# Altium PCB RKSTM32_PCB.PcbDoc
Units mm, origin at the board's own origin, x right, y up, seen from the top; angles counter-clockwise.
Board outline 36.72 x 26.1 mm, 2 copper layers (Top Layer, Bottom Layer), stack 1.671 mm thick; 31 components, 26 nets, 137 pads, 0 vias.
Unrouted connection lines stored in the file: 87.
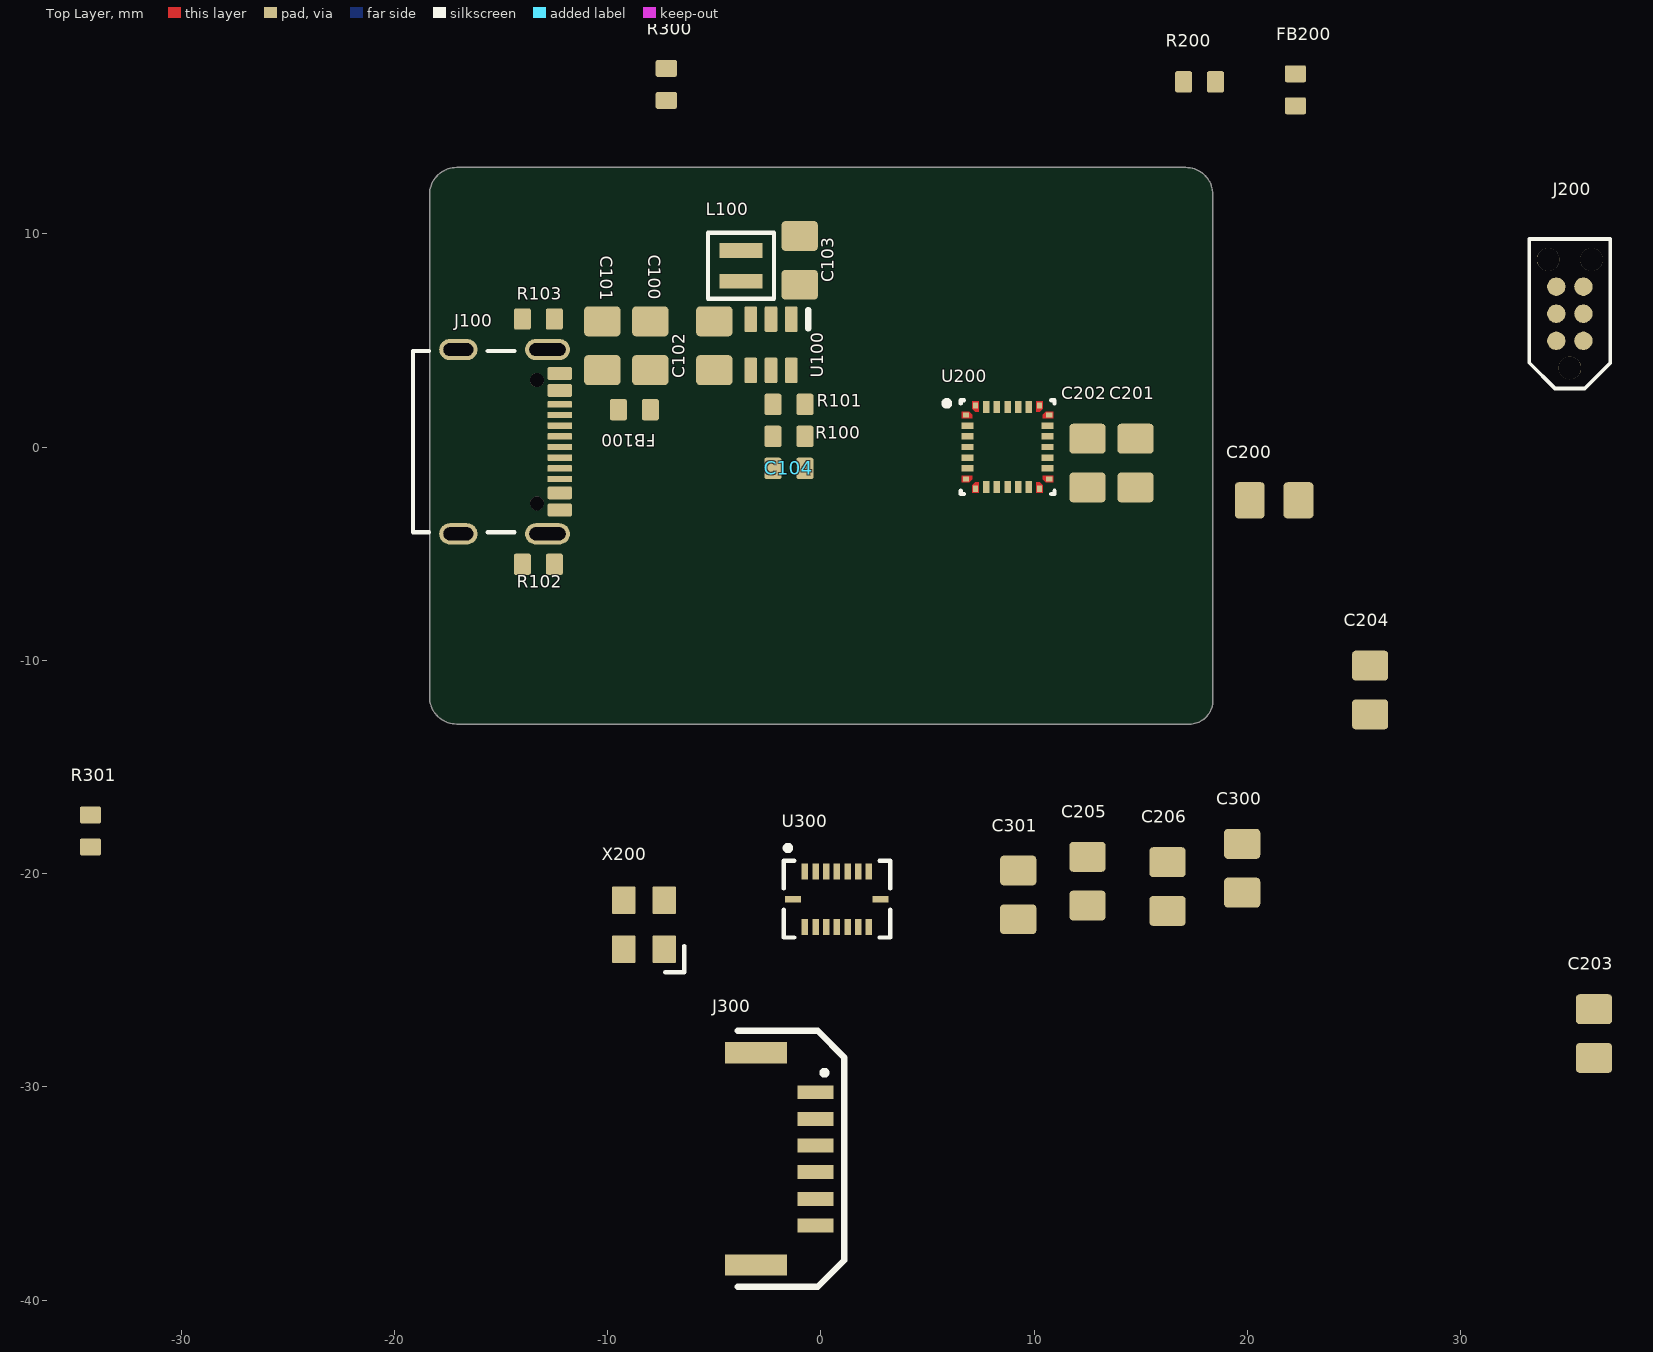
[diagram p0: Top Layer view]
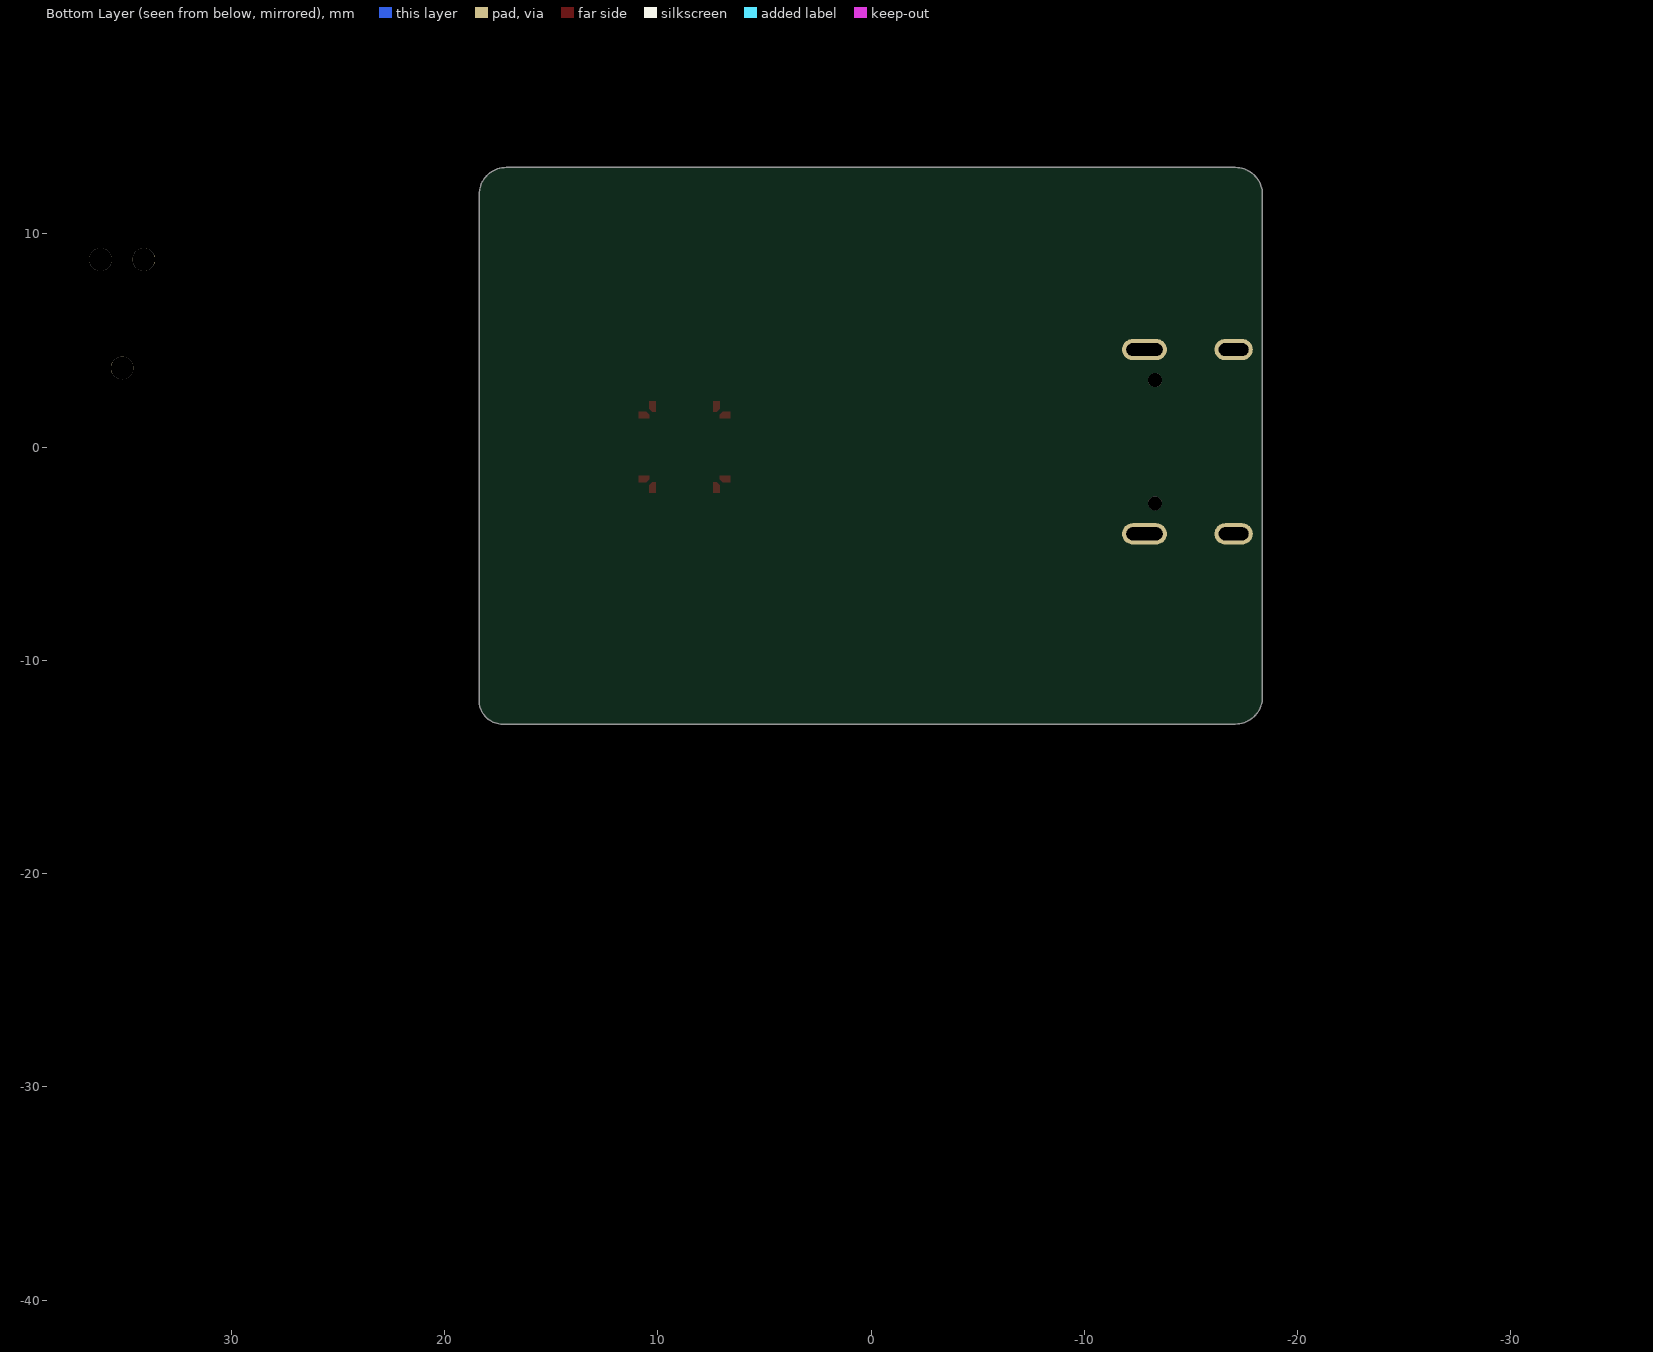
[diagram p1: Bottom Layer view, seen from below]

## Layer stack, top to bottom
Top Solder: solder mask 0.0102, Solder Resist, Dk 3.5
Top Layer: signal copper 0.0356
Dielectric 1: dielectric 1.6, FR-4, Dk 4.6
Bottom Layer: signal copper 0.0356
Bottom Solder: solder mask 0.0102, Solder Resist, Dk 3.5

## Board outline
-18.35,-11.72 ccw(c-17.08,-11.72) -17.08,-12.99 17.275,-12.99 ccw(c17.275,-11.89) 18.375,-11.89 18.375,11.84 ccw(c17.105,11.84) 17.105,13.11 -17.08,13.11 ccw(c-17.08,11.84) -18.35,11.84

## Design rules (kind name [scope] priority, off if disabled: settings)
Clearance [All] p1: gap=0.254 ignorepadtopadclearanceinfootprint=FALSE except(0.2: Arc-Arc Arc-Track Track-Track)
DiffPairsRouting [All] p1: maxlimit=0.254 minlimit=0.254 mostfreqgap=0.254 toplayer_minwidth=0.381 toplayer_maxwidth=0.381 toplayer_prefwidth=0.381 bottomlayer_minwidth=0.381 bottomlayer_maxwidth=0.381 bottomlayer_prefwidth=0.381 maxuncoupledlength=12.7
PolygonConnect [All] p1: thpad.connectstyle=Relief thpad.reliefconductorwidth=0.254 thpad.reliefentries=4 thpad.polygonreliefangle="90 Angle" thpad.airgapwidth=0.254 smdpad.connectstyle=Relief smdpad.reliefconductorwidth=0.254 smdpad.reliefentries=4 smdpad.polygonreliefangle="90 Angle" smdpad.airgapwidth=0.254 via.connectstyle=Direct via.reliefconductorwidth=0.254 via.reliefentries=4 via.polygonreliefangle="90 Angle" via.airgapwidth=0.254
RoutingVias [All] p1: holewidth=0.3 width=0.7 viastyle="Through Hole" minholewidth=0.25 minwidth=0.6 maxholewidth=0.3 maxwidth=0.7
SolderMaskExpansion [All] p1: expansion=0 istentingtop=FALSE
SupplyNets "Schematic Supply Nets_4" [InNet('+3V3')] p1: voltage=0.000
SupplyNets "Schematic Supply Nets_3" [InNet('GND')] p2: voltage=0.000
SupplyNets "Schematic Supply Nets_2" [InNet('+VBUS')] p3: voltage=0.000
SupplyNets "Schematic Supply Nets_1" [InNet('+3V3A')] p4: voltage=0.000
SupplyNets "Schematic Supply Nets" [InNet('+5V')] p5: voltage=0.000
UnRoutedNet [All] p1: checkbadconnections=TRUE
Width [All] p1: maxlimit=1 minlimit=0.15 preferedwidth=0.3
28 further rules are at their usual default settings.

## Classes and differential pairs
differential pair USB_D: +USB_D_P -USB_D_N

## Components (designator, comment, footprint, x,y, rotation, side; value= is the part's Value field where it differs from the comment)
C100 "100n" CAP_0805 -8,4.75 r270 top
C101 "100n" CAP_0805 -10.25,4.75 r270 top
C102 "4u7" CAP_0805 -5,4.75 r270 top
C103 "4u7" CAP_0805 -0.996,8.752 r90 top
C104 "22p" CAP_0603 -1.5,-1 r0 top
C200 "100n" CAP_0805 21.25,-2.5 r180 top
C201 "100n" CAP_0805 14.75,-0.75 r90 top
C202 "100n" CAP_0805 12.5,-0.75 r90 top
C203 "10p" CAP_0805 36.25,-27.5 r90 top
C204 "10p" CAP_0805 25.75,-11.393 r90 top
C205 "100n" CAP_0805 12.5,-20.357 r90 top
C206 "100n" CAP_0805 16.25,-20.607 r90 top
C300 "100n" CAP_0805 19.75,-19.75 r90 top
C301 "100n" CAP_0805 9.25,-21 r90 top
FB100 "120R" FB_0603 -8.75,1.75 r180 top
FB200 "120R" FB_0603 22.25,16.75 r90 top
J100 "USB4105-GF-A-060" USB4105-GF-A-060 -14.623,0.25 r270 top
J200 "TC2030-NL" TC2030-NL-FP 35.115,6.25 r90 top
J300 "SM06B-GHS-TB" SM06B-GHS-TB -1.65,-33.375 r270 top
L100 "10u" FP-NRH2412-MFG -3.75,8.5 r90 top
R100 "887K" RES_0603 -1.5,0.5 r0 top
R101 "280K" RES_0603 -1.5,2 r180 top
R102 "5K1" RES_0603 -13.25,-5.5 r180 top
R103 "5K1" RES_0603 -13.25,6 r180 top
R200 "5K1" RES_0603 17.75,17.125 r180 top
R300 "5K1" RES_0603 -7.25,17 r90 top
R301 "5K1" RES_0603 -34.25,-18 r90 top
U100 "LTC3405ES6#TRMPBF" SOT-23-6 -2.34,4.796 r180 top
U200 "STM32F042G6U6" STM-UFQFPN28_V 8.75,0 r0 top
U300 "BMI088" BMI088 0.75,-21.2 r0 top
X200 "24MHz" XTAL_3225 -8.3,-22.4 r90 top

## Footprints (in the part's own frame and the unit in brackets; to place one, negate y for a bottom-side part, rotate by r counter-clockwise, add the part's x,y. Pads: shape width x height; smd on the part's side, far side on the other; paste and mask are expansions set on the pad)
BMI088 [mm]
  rect 0.3x0.75 smd: 1(-1.5,1.3) 2(-1,1.3) 3(-0.5,1.3) 4(0,1.3) 5(0.5,1.3) 6(1,1.3) 7(1.5,1.3) 9(1.5,-1.3) 10(1,-1.3) 11(0.5,-1.3) 12(0,-1.3) 13(-0.5,-1.3) 14(-1,-1.3) 15(-1.5,-1.3)
  rect 0.75x0.3 smd: 8(2.05,0) 16(-2.05,0)
  silkscreen extent -2.5,-1.8 2.5,2.51, body extent -2.25,-1.5 2.25,1.5, height 1.01
CAP_0603 [mm]
  rrect25% 0.8x1 smd: 1(-0.75,0) 2(0.75,0)
  body extent -0.8,-0.4 0.8,0.4, height 0.51
CAP_0805 [mm]
  rrect25% 1.4x1.7 smd: 1(-1.143,0) 2(1.143,0)
  body extent -1.15,-0.76 1.15,0.79, height 1.01
FB_0603 [mm]
  rrect25% 0.8x1 smd: 1(-0.75,0) 2(0.75,0)
  body extent -0.8,-0.4 0.8,0.4, height 0.81
FP-NRH2412-MFG [mm]
  rect 0.7x2 smd paste+0 mask+0: 1(-0.725,0) 2(0.725,0)
  silkscreen extent -1.55,-1.55 1.55,1.55, body extent -1.35,-1.35 1.35,1.35, height 0.25
RES_0603 [mm]
  rrect25% 0.8x1 smd: 1(-0.75,0) 2(0.75,0)
  body extent -0.8,-0.43 0.8,0.43, height 0.52
SM06B-GHS-TB [mm]
  rect 0.65x1.7 smd: 1(-3.125,1.4) 2(-1.875,1.4) 3(-0.625,1.4) 4(0.625,1.4) 5(1.875,1.4) 6(3.125,1.4)
  rect 1x2.9 smd: ""(-4.975,-1.4) ""(4.975,-1.4)
  silkscreen extent -6,-2.25 6,2.75, body extent -5.38,-2.8 5.38,2.05, height 4.26
SOT-23-6 [mm]
  rrect25% 0.6x1.2 smd: 1(-0.95,-1.2) 2(0,-1.2) 3(0.95,-1.2) 4(0.95,1.2) 5(0,1.2) 6(-0.95,1.2)
  silkscreen extent -1.75,-1.63 -1.75,-0.76, body extent -1.45,-1.4 1.45,1.4, height 1.45
STM-UFQFPN28_V [mm] "QFN, 28-Leads, Body 4.1x4.1mm, Pitch 0.5mm"
  rect 0.3x0.25 smd: 1(-1.95,1.5) 7(-1.95,-1.5) 15(1.95,-1.5) 21(1.95,1.5)
  rect 0.55x0.3 smd: 2(-1.875,1) 3(-1.875,0.5) 4(-1.875,0) 5(-1.875,-0.5) 6(-1.875,-1) 16(1.875,-1) 17(1.875,-0.5) 18(1.875,0) 19(1.875,0.5) 20(1.875,1)
  rect 0.25x0.3 smd: 8(-1.5,-1.95) 14(1.5,-1.95) 22(1.5,1.95) 28(-1.5,1.95)
  rect 0.3x0.55 smd: 9(-1,-1.875) 10(-0.5,-1.875) 11(0,-1.875) 12(0.5,-1.875) 13(1,-1.875) 23(1,1.875) 24(0.5,1.875) 25(0,1.875) 26(-0.5,1.875) 27(-1,1.875)
  Top Layer region: -2.15,-1.35 -1.65,-1.35 -1.65,-1.505 -1.795,-1.65 -2.15,-1.65
  Top Layer region: -1.35,-2.15 -1.35,-1.65 -1.505,-1.65 -1.65,-1.795 -1.65,-2.15
  Top Layer region: -1.35,2.15 -1.35,1.65 -1.505,1.65 -1.65,1.795 -1.65,2.15
  Top Layer region: 1.35,-2.15 1.35,-1.65 1.505,-1.65 1.65,-1.795 1.65,-2.15
  Top Layer region: 2.15,1.35 1.65,1.35 1.65,1.505 1.795,1.65 2.15,1.65
  Top Layer region: -2.15,1.35 -1.65,1.35 -1.65,1.505 -1.795,1.65 -2.15,1.65
  Top Layer region: 2.15,-1.35 1.65,-1.35 1.65,-1.505 1.795,-1.65 2.15,-1.65
  Top Layer region: 1.35,2.15 1.35,1.65 1.505,1.65 1.65,1.795 1.65,2.15
  silkscreen extent -2.97,-2.2 2.2,2.2, body extent -2.05,-2.05 2.05,2.05, height 0.6
TC2030-NL-FP [mil]
  round 33.98 smd paste-16.99: 1(-50,-25) 2(-50,25) 3(0,-25) 4(0,25) 5(50,-25) 6(50,25)
  round 42.01 hole 42.01 unplated: MH(-100,0) MH(100,-40) MH(100,40)
  silkscreen extent -138,-75 138,75
USB4105-GF-A-060 [mm]
  rrect25% 0.6x1.15 smd mask+0.05: A1B12(-3.2,2.378) A4B9(-2.4,2.378) B1A12(3.2,2.378) B4A9(2.4,2.378)
  rrect25% 0.3x1.15 smd mask+0.05: A5(-1.25,2.378) A6(-0.25,2.378) A7(0.25,2.378) A8(1.25,2.378) B5(1.75,2.378) B6(0.75,2.378) B7(-0.75,2.378) B8(-1.75,2.378)
  round 0.65 hole 0.65 unplated mask+0.05: MH(-2.89,1.303) MH(2.89,1.303)
  oval 1x2.1 hole 0.6 slot 1.7 at 90 deg: SH(-4.32,1.803) SH(4.32,1.803)
  oval 1x1.8 hole 0.6 slot 1.4 at 90 deg: SH(-4.32,-2.377) SH(4.32,-2.377)
  silkscreen extent -4.25,-4.5 4.25,0.25, body extent -4.47,-4.97 4.47,2.73, height 3.27
XTAL_3225 [mm]
  rrect10% 1.3x1.1 smd: 1(-1.15,-0.95) 2(1.15,-0.95) 3(1.15,0.95) 4(-1.15,0.95)
  silkscreen extent -2.23,-1.89 -1,-1, body extent -1.6,-1.28 1.6,1.22, height 0.61

## Part data
C100 C101 C102 C103 C200 C201 C202 C203 C204 C205 C206 C300 C301: library part CAP_0805, "Capacitor SMD 0805"
C104: library part CAP_0603, "Capacitor SMD 0603"
FB100 FB200: library part FB_0603, "Ferrite Bead SMD 0603"
J100: "USB Connector Type C SMT 12 Pin", Manufacturer=GCT, Distributor Link=https://eu.mouser.com/ProductDetail/GCT/USB4105-GF-A-060?qs=QNEnbhJQKvY2mocwNJzgfA%3D%3D, Manufacturer Part Number=USB4105-GF-A-060
J200: "Tag-Connect No-Solder SWD Debug Connector (No Legs) DO NOT PLACE", Manufacturer=Tag-Connect, Manufacturer Part Number=TC2030-NL-FP
J300: "Header Connector 6 Position 1.25MM Pitch SMD Horizontal JST GH", Manufacturer=JST, Manufacturer Part Number=SM06B-GHS-TB
L100: library part CMP-14484-000582-1, "Shielded Wirewound Inductor 10uH 20% 0.51A 0.72Ω SMD", Case/Package=Nonstandard, Current Rating=450mA, DC Resistance (DCR)=600mR, Inductance=10uH, Max DC Current=810mA, Max Operating Temperature=120°C, Min Operating Temperature=-25°C, Package Quantity=2500, Self Resonant Frequency=29MHz, Test Frequency=100kHz, Tolerance=20%, Core Material=Ferrite, Halogen Free="Halogen Free", Height=1.2mm, Height - Seated (Max)=0.047inch, Length=0.095inch, Mount="Surface Mount", Packaging="Tape and Reel", RoHS Compliant=Yes, Saturation Current=810mA, Shielding=Shielded, Termination=SMD/SMT, Width=0.095inch
R100 R101 R102 R103 R200 R300 R301: library part RES_0603, "Resistor SMD 0603"
U100: "1.5MHz, 300mA / Synchronous Step-Down / Regulator in ThinSOT", Manufacturer="Analog Devices", Manufacturer Part Number=LTC3405ES6#TRMPBF
U200: library part CMP-0304-00112-2, "ARM Cortex-M0 32-bit MCU, 32 KB Flash, 6 KB Internal RAM, 24 I/Os, 28-Pin UFQFPN, -40 to 85 degC, Tray", I/Os (High Current)=24, Manufacturer=STMicroelectronics, Operating Frequency(F) (Processor speed) (MHz)=48, Package Description="28-Pin Ultra Thin Fine Pitch Quad Flat No-Lead, 4 x 4 x 0.6 mm Body, 0.5 mm Pitch", Package Reference=UFQFPN28, Supply Voltage(Vcc) min (V)=2, ComponentLink1Description="Manufacturer URL", ComponentLink1URL=http://www.st.com/, ComponentLink2Description=Datasheet, ComponentLink2URL=http://www.st.com/st-web-ui/static/active/en/resource/technical/document/datasheet/DM00105814.pdf, Core="ARM Cortex-M0", DatasheetVersion="Rev. 5", FLASH Size (Prog) (kB)=32, Internal RAM Size (kB)=6, Mounting Technology="Surface Mount", Packing=Tray, PartNumber=STM32F042G6U6
U300: "Inertial Measurement Unit IMU 6-Axis LGA", Manufacturer=Bosch, Manufacturer Part Number=BMI088
X200: library part TSX-3225_24.0000MF15X-AC, "Crystal SMD 24MHz 10PPM 7pF 3225", Manufacturer=Epson, Manufacturer Part Number="TSX-3225 24.0000MF15X-AC"

## Nets (pads, with @x,y where several pads share a name; then routed paths per layer and width w, separated by ;. In a path a pad name is that pad's centre, name@x,y a point inside that pad or via, vN(x,y) a via of type N, cw(c..) or ccw(c..) an arc to the next point about the centre after c; other vN are vias at no path point)
+3V3: C103.2 C104.2 C201.2 C202.2 C205.2 C300.2 C301.2 FB200.1 J200.1 J300.1 L100.2 R100.2 R300.2 R301.2 U200.17 U200.18 U300.3 U300.11
+3V3A: C206.2 FB200.2 U200.5
+5V: C101.2 C102.2 FB100.2 U100.1 U100.4
+VBUS: C100.2 FB100.1 J100.A4B9 J100.B4A9
BOOT0: R200.2 U200.1
BUCK_SW: L100.1 U100.3
BUCK_VFB: C104.1 R100.1 R101.2 U100.5
GND: C100.1 C101.1 C102.1 C103.1 C200.1 C201.1 C202.1 C203.1 C204.1 C205.1 C206.1 C300.1 C301.1 J100.A1B12 J100.B1A12 J200.5 J300.2 J300.4 J300.6 R101.1 R102.1 R103.1 R200.1 U100.2 U100.6 U200.16 U300.2 U300.4 U300.6 U300.7 X200.2 X200.4
I2C_SCL: J300.3 U200.27
I2C_SDA: J300.5 U200.28
IMU_INT1: R301.1 U200.14 U300.16
IMU_INT2: R300.1 U200.15 U300.12
IMU_MISO: U200.12 U300.10
IMU_MOSI: U200.13 U300.9
IMU_NCS_ACC: U200.8 U300.14
IMU_NCS_GYR: U200.9 U300.5
IMU_SCK: U200.11 U300.8
NRST: C200.2 J200.3 U200.4
OSC_IN: C203.2 U200.2 X200.1
OSC_OUT: C204.2 U200.3 X200.3
SWCLK: J200.4 U200.22
SWDIO: J200.2 U200.21
USB_CC1: J100.A5 R103.2
USB_CC2: J100.B5 R102.2
USB_D_N: J100.A7 J100.B7 U200.19
USB_D_P: J100.A6 J100.B6 U200.20
pads on no net: J100.A8 J100.B8 J100.MH J100.SH J200.6 J200.MH J300. U200.6 U200.7 U200.10 U200.23 U200.24 U200.25 U200.26 U300.1 U300.13 U300.15

## Silkscreen, mask and mechanical layers (free items; w line width, h text height)
Mechanical 1:
  lines w0.254: -18.35,-11.72 ccw(c-17.08,-11.72) -17.08,-12.99 -16.625,-12.99 17.275,-12.99 ccw(c17.275,-11.89) 18.375,-11.89 18.375,11.84 ccw(c17.105,11.84) 17.105,13.11 -17.08,13.11 ccw(c-17.08,11.84) -18.35,11.84 -18.35,-11.72